# EAGLE board Circlez8a (EAGLE 6.3)
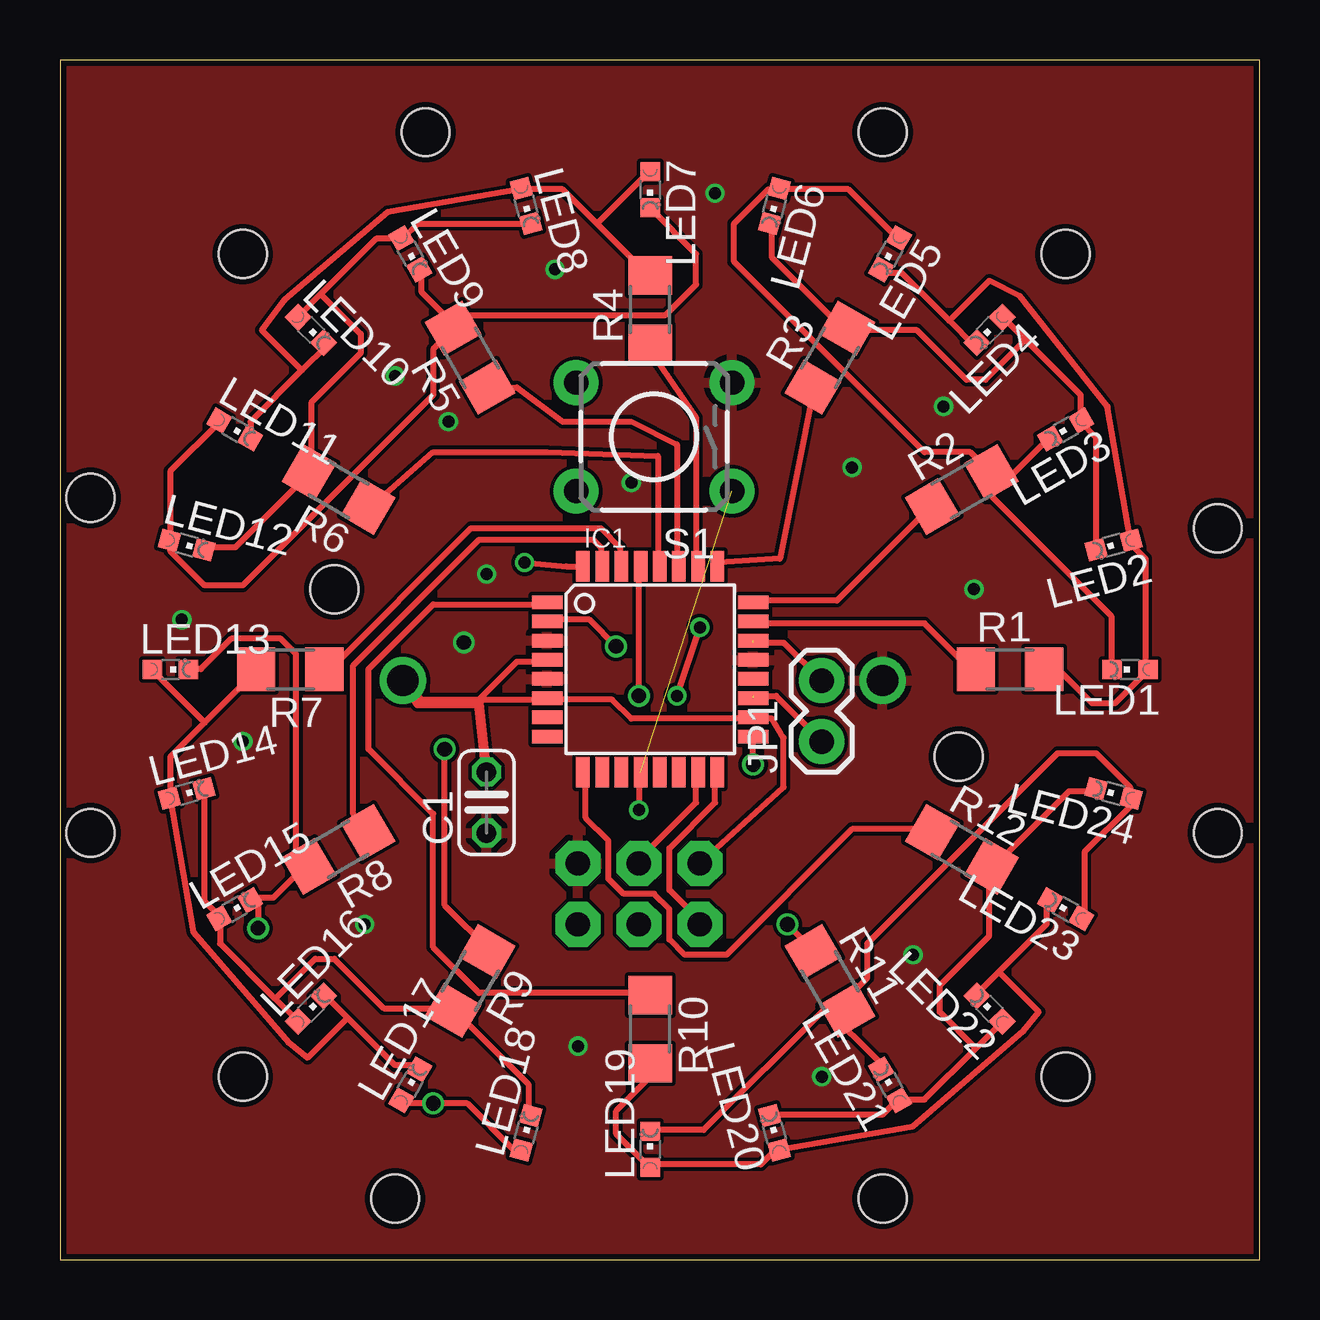
[diagram p0: board, top side]
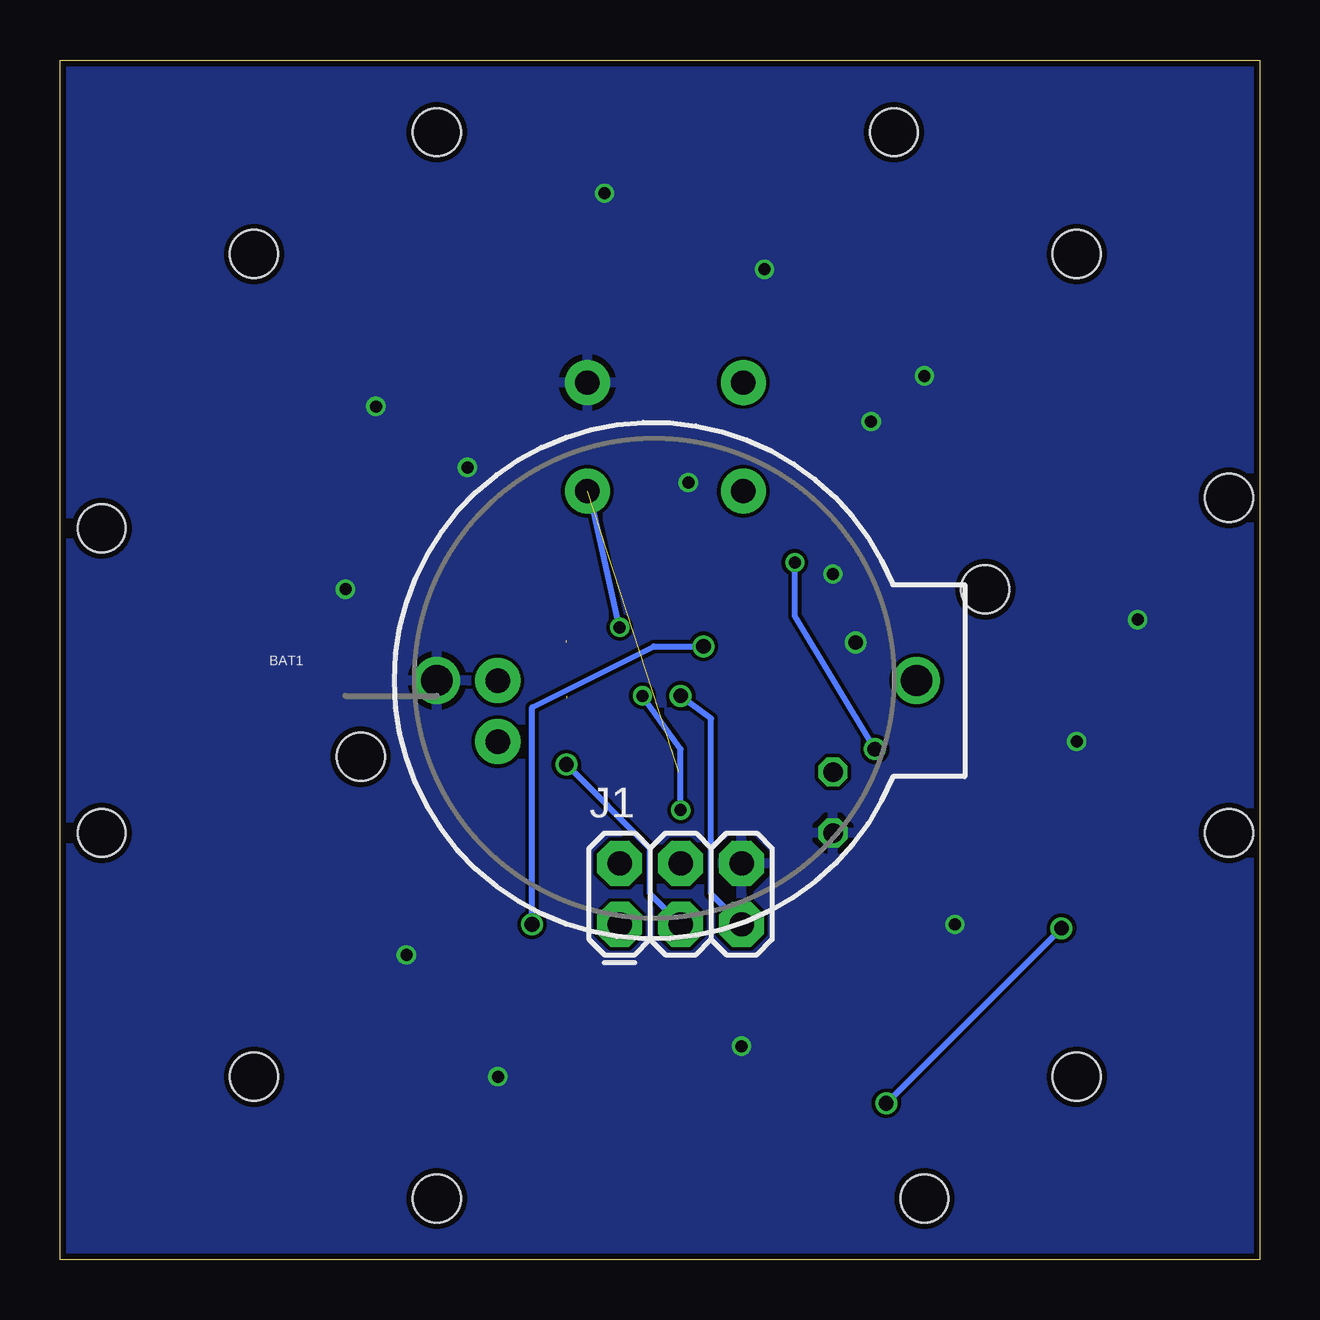
[diagram p1: board, bottom side, seen from below]

Size 50 x 50 mm. Coordinates in mm from the lower left corner, seen from the top.
Outline: 0,0 50,0 50,50 0,50 0,0
Copper layers (1*2*15*16): Top 0.035mm / dielectric 0.2mm / layer 2 0.0175mm / dielectric 1.1mm / layer 15 0.0175mm / dielectric 0.2mm / Bottom 0.035mm
Design rules "SeeedStudio_DRU_no_angle_20130527": minimum track width 6mil, minimum drill 12mil, track to track 6mil, track to pad 6mil, pad to pad 6mil, via to via 6mil, smd to smd 0mil, copper to edge 10mil, drill to drill 10mil, minimum pad ring 6mil, minimum via ring 6mil, stop-mask expansion 2mil, vias tented up to drill 25mil, thermal gap 10mil
Holes 2 mm at 41.91,41.91 48.26,30.48 48.26,17.78 41.91,7.62 34.29,2.54 34.29,46.99 15.24,46.99 7.62,41.91 1.27,31.75 1.27,17.78 7.62,7.62 13.97,2.54 37.47,20.95 11.43,27.94

## Footprints (pad centres in the part's own frame; a part is rotated, then mirrored left to right if it is on the bottom)
BATTCOM_20MM_PTH = drill 1.3: 1 20,0; 2 0,0
C025-024X044 = drill 0.813 octagon: 1 -1.27,0; 2 1.27,0
TQFP32-08 = smd 1.27 x 0.559: 1 -4.293,2.8; 2 -4.293,2; 3 -4.293,1.2; 4 -4.293,0.4; 5 -4.293,-0.4; 6 -4.293,-1.2; 7 -4.293,-2; 8 -4.293,-2.8; 17 4.293,-2.8; 18 4.293,-2; 19 4.293,-1.2; 20 4.293,-0.4; 21 4.293,0.4; 22 4.293,1.2; 23 4.293,2; 24 4.293,2.8 | smd 0.559 x 1.27: 9 -2.8,-4.293; 10 -2,-4.293; 11 -1.2,-4.293; 12 -0.4,-4.293; 13 0.4,-4.293; 14 1.2,-4.293; 15 2,-4.293; 16 2.8,-4.293; 25 2.8,4.293; 26 2,4.293; 27 1.2,4.293; 28 0.4,4.293; 29 -0.4,4.293; 30 -1.2,4.293; 31 -2,4.293; 32 -2.8,4.293
2X3 = drill 1.016 pad 1.88 octagon: 1 0,0; 2 0,2.54; 3 2.54,0; 4 2.54,2.54; 5 5.08,0; 6 5.08,2.54
1X02 = drill 1.016 pad 1.88: 1 0,0; 2 2.54,0
CHIPLED_0603 = smd 0.8 x 0.8: A 0,-0.75; C 0,0.75
R1206 = smd 1.6 x 1.803: 1 -1.422,0; 2 1.422,0
TACTILE-PTH = drill 1.016 pad 1.88: 1 -3.251,2.261; 2 3.251,2.261; 3 -3.251,-2.261; 4 3.251,-2.261

## Placement (x,y rotation side)
BAT1  [BATTCOM_20MM_PTH]  34.29,24.13 0 bottom
C1  [C025-024X044]  17.78,19.05 90 top
IC1  MEGA8-AI  [TQFP32-08]  24.6,24.6 0 top
J1  AVR_SPI_PRG_6PTH  [2X3]  26.67,13.97 0 bottom
JP1  [1X02]  31.75,21.59 90 top
LED1  [CHIPLED_0603]  44.6,24.6 90 top
LED2  [CHIPLED_0603]  43.92,29.78 105 top
LED3  [CHIPLED_0603]  41.92,34.6 120 top
LED4  [CHIPLED_0603]  38.74,38.74 135 top
LED5  [CHIPLED_0603]  34.6,41.92 150 top
LED6  [CHIPLED_0603]  29.78,43.92 165 top
LED7  [CHIPLED_0603]  24.6,44.6 180 top
LED8  [CHIPLED_0603]  19.42,43.92 195 top
LED9  [CHIPLED_0603]  14.6,41.92 210 top
LED10  [CHIPLED_0603]  10.46,38.74 225 top
LED11  [CHIPLED_0603]  7.28,34.6 240 top
LED12  [CHIPLED_0603]  5.28,29.78 255 top
LED13  [CHIPLED_0603]  4.6,24.6 270 top
LED14  [CHIPLED_0603]  5.28,19.42 285 top
LED15  [CHIPLED_0603]  7.28,14.6 300 top
LED16  [CHIPLED_0603]  10.46,10.46 315 top
LED17  [CHIPLED_0603]  14.6,7.28 330 top
LED18  [CHIPLED_0603]  19.42,5.28 345 top
LED19  [CHIPLED_0603]  24.6,4.6 0 top
LED20  [CHIPLED_0603]  29.78,5.28 15 top
LED21  [CHIPLED_0603]  34.6,7.28 30 top
LED22  [CHIPLED_0603]  38.74,10.46 45 top
LED23  [CHIPLED_0603]  41.92,14.6 60 top
LED24  [CHIPLED_0603]  43.92,19.42 75 top
R1  [R1206]  39.6,24.6 0 top
R2  [R1206]  37.59,32.1 30 top
R3  [R1206]  32.1,37.59 60 top
R4  [R1206]  24.6,39.6 90 top
R5  [R1206]  17.1,37.59 120 top
R6  [R1206]  11.61,32.1 150 top
R7  [R1206]  9.6,24.6 180 top
R8  [R1206]  11.61,17.1 210 top
R9  [R1206]  17.1,11.61 240 top
R10  [R1206]  24.6,9.6 270 top
R11  [R1206]  32.1,11.61 300 top
R12  [R1206]  37.59,17.1 330 top
S1  SWITCH-MOMENTARY-2PTH  [TACTILE-PTH]  24.77,34.29 180 top

## Library data of the parts
BAT1 = SparkFun
C1 R1-R12 = resistor
IC1 = atmel; MPN: ATMEGA8-16AU; OC_FARNELL: 9171371; OC_NEWARK: 73M8863
J1 JP1 = SparkFun-Connectors
LED1-LED24 = led
S1 = SparkFun-Electromechanical

## Nets
GND: BAT1.2 C1.1 IC1.3 IC1.5 IC1.21 J1.6 S1.3
N$1: IC1.12 S1.1
N$3: IC1.16 J1.1
N$4: IC1.17 J1.3
N$5: IC1.15 J1.4
N$6: IC1.29 J1.5
N$9: LED1.A LED2.A LED4.C LED5.C R1.2
N$10: LED2.C LED3.A LED4.A LED6.C R3.2
N$11: LED1.C LED3.C LED5.A LED6.A R2.2
N$12: IC1.22 JP1.2
N$13: LED7.A LED8.A LED10.C LED11.C R4.2
N$14: LED8.C LED9.A LED10.A LED12.C R6.2
N$15: LED7.C LED9.C LED11.A LED12.A R5.2
N$16: LED13.A LED14.A LED16.C LED17.C R7.2
N$17: LED14.C LED15.A LED16.A LED18.C R9.2
N$18: LED13.C LED15.C LED17.A LED18.A R8.2
N$19: LED19.A LED20.A LED22.C LED23.C R10.2
N$20: LED20.C LED21.A LED22.A LED24.C R12.2
N$21: LED19.C LED21.C LED23.A LED24.A R11.2
N$22: IC1.23 R1.1
N$23: IC1.24 R2.1
N$24: IC1.25 R3.1
N$25: IC1.26 R4.1
N$26: IC1.27 R5.1
N$27: IC1.28 R6.1
N$28: IC1.30 R7.1
N$29: IC1.31 R8.1
N$30: IC1.32 R9.1
N$31: IC1.1 R10.1
N$32: IC1.2 R11.1
N$33: IC1.9 R12.1
N$34: IC1.19 JP1.1
VCC: BAT1.1 C1.2 IC1.4 IC1.6 IC1.18 J1.2

## Tracks (layer width: path | path; a pad name or v marks a point on that pad's centre or on a via)
GND  (via drill 0.5, 0.6)
  other vias: 16.83,25.72 21.59,8.89 5.08,26.67 27.3,44.45 33.02,33.02 38.1,27.94 16.19,34.92 7.62,21.59 12.7,13.97 13.97,36.83 20.64,41.27 36.83,35.56 35.56,12.7 31.75,7.62 17.78,28.57 23.81,32.38
  pour Top: -2.54,85.09 106.68,85.09 106.68,-2.54 -3.81,-2.54
  pour Bottom: -7.62,83.82 105.41,85.09 104.14,-3.81 -7.62,-2.54
N$1  (1 unrouted)
N$3
  Top 0.254: J1.1 26.67,14.13 25.4,15.4 25.4,17.14 27.3,19.05 27.3,20.16 IC1.16
N$4  (via drill 0.61)
  Top 0.254: v28.89,20.64 28.89,21.75 IC1.17
  Bottom 0.254: v28.89,20.64 25.4,17.14 25.4,15.24 J1.3
N$5
  Top 0.254: J1.4 24.13,16.67 26.51,19.05 26.51,20.16 IC1.15
N$6  (via drill 0.61)
  Top 0.254: v24.13,23.5 24.13,28.89 IC1.29
  Bottom 0.254: v24.13,23.5 22.86,22.54 22.86,15.24 J1.5
N$7  (via drill 0.5)
  Top 0.254: 24.13,20.64 v24.13,18.73 | v25.72,23.5 v26.67,26.35
  Bottom 0.254: v24.13,18.73 24.13,21.27 v25.72,23.5 | v26.67,26.35 27.94,32.07
N$9
  Top 0.254: 37.07,39.13 38.1,38.1 LED4.C | 37.07,39.13 35.08,41.12 34.29,41.12 LED5.C | R1.2 41.12,24.45 41.75,24.45 43.02,23.18 43.97,23.18 45.24,24.45 LED1.A 45.24,24.61 45.24,29.21 44.61,29.84 LED2.A 44.61,30 43.66,35.56 40.01,40.16 38.73,40.8 37.07,39.13
N$10
  Top 0.254: LED6.C 29.69,43.18 29.69,41.75 32.7,38.73 R3.2 32.86,38.73 35.72,38.73 37.78,36.67 38.58,36.67 40.24,38.34 | LED2.C 43.18,29.69 43.18,34.29 42.55,34.92 LED3.A 42.55,35.08 42.55,36.04 40.24,38.34 | 40.24,38.34 39.37,39.21 LED4.A
N$11
  Top 0.254: LED5.A 34.92,42.55 32.86,44.61 30,44.61 LED6.A 29.84,44.61 29.53,44.61 28.1,43.18 28.1,41.59 36.04,33.66 37.94,33.66 38.73,32.86 R2.2 | LED1.C 43.81,24.61 43.81,26.83 38.73,31.91 38.73,32.7 R2.2 | LED3.C 41.12,34.13 38.89,31.91 R2.2
N$12  (1 unrouted)
  Top 0.254: 28.89,25.72 30.16,25.72 JP1.2
N$13
  Top 0.254: 10.08,37.07 11.11,38.1 LED10.C | 10.08,37.07 7.94,34.92 7.94,34.29 LED11.C | 22.38,43.18 24.45,41.12 R4.2 | 22.38,43.18 20.95,44.61 19.37,44.61 LED8.A 19.21,44.61 13.65,43.66 9.37,40.01 8.41,38.73 10.08,37.07 | 22.38,43.18 24.45,45.24 LED7.A
N$14
  Top 0.254: LED12.C 6.03,29.69 7.3,29.69 10.32,32.7 R6.2 10.48,32.86 10.48,35.72 12.54,37.78 12.54,38.58 10.87,40.24 | 10.87,40.24 13.18,42.55 14.13,42.55 LED9.A 14.29,42.55 14.92,43.18 19.53,43.18 LED8.C | 10.87,40.24 10,39.37 LED10.A
N$15
  Top 0.254: LED11.A 6.67,34.92 4.6,32.86 4.6,30 LED12.A 4.6,29.84 4.6,29.53 6.03,28.1 7.62,28.1 15.56,36.04 15.56,37.94 16.35,38.73 R5.2 | LED9.C 15.08,41.12 15.08,40.32 16.51,38.89 R5.2 | LED7.C 24.61,43.81 26.51,41.91 26.51,40.64 25.24,39.37 16.19,39.37 R5.2
N$16
  Top 0.254: 11.99,10.08 13.97,8.1 14.76,8.1 14.92,7.94 LED17.C | 11.99,10.08 11.11,10.95 LED16.C | 6.03,22.38 8.1,24.45 R7.2 | 6.03,22.38 4.6,20.95 4.6,19.37 LED14.A 4.6,19.21 5.56,13.65 9.53,9.05 10.32,8.41 11.99,10.08 | 6.03,22.38 3.97,24.45 LED13.A
N$17
  Top 0.254: LED18.C 19.53,6.03 19.53,7.3 16.51,10.32 R9.2 16.35,10.48 13.49,10.48 11.43,12.54 10.64,12.54 8.97,10.87 | 8.97,10.87 6.67,13.18 6.67,14.13 LED15.A 6.67,14.29 6.03,14.92 6.03,19.53 LED14.C | 8.97,10.87 9.84,10 LED16.A
N$18  (via drill 0.61)
  Top 0.254: LED17.A 14.29,6.51 v15.56,6.51 16.99,6.51 18.89,4.6 19.21,4.6 LED18.A | 8.26,15.08 8.89,15.08 10.32,16.51 R8.2 9.84,16.19 9.84,25.24 9.21,25.88 7.14,25.88 5.87,24.61 5.4,24.61 LED13.C | 8.26,15.08 7.94,15.08 LED15.C 8.26,15.08 | 8.26,15.08 v8.26,13.81
  Bottom 0.254: v8.26,13.81 v15.56,6.51
N$19
  Top 0.254: 39.13,11.99 41.12,13.97 41.12,14.92 LED23.C | 39.13,11.99 38.26,11.11 LED22.C | R10.2 24.45,8.1 24.45,7.46 23.18,6.19 23.18,5.24 24.45,3.97 LED19.A 24.61,3.97 29.21,3.97 29.84,4.6 LED20.A 30,4.6 35.56,5.56 40.16,9.53 40.8,10.32 39.13,11.99
N$20
  Top 0.254: LED24.C 43.18,19.53 42.07,19.53 38.89,16.35 R12.2 38.73,16.35 38.73,13.49 36.67,11.43 36.67,10.32 38.18,8.81 | LED20.C 29.69,6.03 34.29,6.03 34.92,6.67 LED21.A 35.08,6.67 36.04,6.67 38.18,8.81 | 38.18,8.81 39.21,9.84 LED22.A
N$21
  Top 0.254: LED23.A 42.7,14.29 42.7,16.99 44.61,18.89 44.61,19.21 LED24.A 44.61,19.37 44.61,19.68 43.18,21.11 41.59,21.11 33.66,13.18 33.66,11.75 32.38,10.48 | 31.91,10.48 26.83,5.4 24.61,5.4 LED19.C | 32.38,10.48 32.7,10.48 R11.2 | 32.38,10.48 31.91,10.48 | 31.91,10.48 34.13,8.26 34.13,7.94 LED21.C | 31.91,10.48 R11.2 | 32.38,10.48 R11.2
N$22
  Top 0.254: IC1.23 29.05,26.51 36.04,26.51 38.1,24.45 R1.1
N$23
  Top 0.254: IC1.24 29.05,27.46 32.38,27.46 36.35,31.43 R2.1
N$24
  Top 0.254: IC1.25 27.46,29.05 30,29.21 31.43,36.35 R3.1
N$25
  Top 0.254: IC1.26 26.51,29.05 26.51,35.08 24.45,38.1 R4.1
N$26
  Top 0.254: IC1.27 25.72,29.05 25.72,33.97 23.81,34.92 20.95,34.92 19.05,36.35 17.94,36.35 R5.1
N$27
  Top 0.254: IC1.28 24.92,29.05 24.92,33.5 20.32,33.66 15.56,33.66 12.86,31.27 R6.1
N$28
  Top 0.254: IC1.30 23.34,29.05 23.34,29.69 22.54,30.48 17.14,30.48 11.11,24.45 R7.1
N$29
  Top 0.254: IC1.31 22.54,29.05 22.54,29.69 22.23,30 17.46,30 12.22,24.77 12.22,18.57 12.86,17.94 R8.1
N$30  (via drill 0.5, 0.61)
  Top 0.254: v19.37,29.05 21.11,28.89 21.75,28.89 IC1.32 | v16.03,21.27 16.03,14.76 17.94,12.86 R9.1
  Bottom 0.254: v19.37,29.05 19.37,26.83 v16.03,21.27
N$31
  Top 0.254: IC1.1 20.16,27.3 15.56,27.3 12.86,24.61 12.86,21.27 15.56,18.57 15.56,13.02 17.46,11.11 24.45,11.11 R10.1
N$32  (via drill 0.61)
  Top 0.254: v23.18,25.56 22.07,26.67 20.32,26.67 IC1.2 | v30.32,13.97 31.43,12.86 R11.1
  Bottom 0.254: v23.18,25.56 25.24,25.56 30.32,23.02 v30.32,13.97
N$33
  Top 0.254: IC1.9 21.91,20.16 21.91,18.41 22.86,17.46 22.86,15.88 23.5,15.24 24.77,15.24 25.4,14.61 25.4,13.34 26.04,12.7 27.78,12.7 33.02,17.94 36.35,17.94 R12.1
N$34  (1 unrouted)
  Top 0.254: 28.89,23.5 29.84,23.5 JP1.1
VCC
  Top 0.254: 17.46,23.34 15.08,23.34 BAT1.1 | 17.46,23.34 20.16,23.34 IC1.6 20.32,23.34 23.02,23.34 23.81,22.54 28.89,22.54 IC1.18 29.05,22.54 29.69,22.54 30.16,21.75 30.16,19.68 J1.2 | 17.46,23.34 19.05,24.92 20.16,24.92 IC1.4
  Top 0.406: C1.2 17.46,23.18 14.92,23.18 BAT1.1

## Text on the board
Document: 2 | 1 | ATmega8a | 24
bDocu: Circlez - v1.0 Feb2014 | http://kalshagar.wikispaces.com/Circlez | ADC7 | GND | ADC6 | ISP